# Altium PCB Alimentação v2.PcbDoc
Units mm, origin at the board's own origin, x right, y up, seen from the top; angles counter-clockwise.
Board outline 61.9 x 57.66 mm, 2 copper layers (Top Layer, Bottom Layer); 18 components, 10 nets, 39 pads, 0 vias.
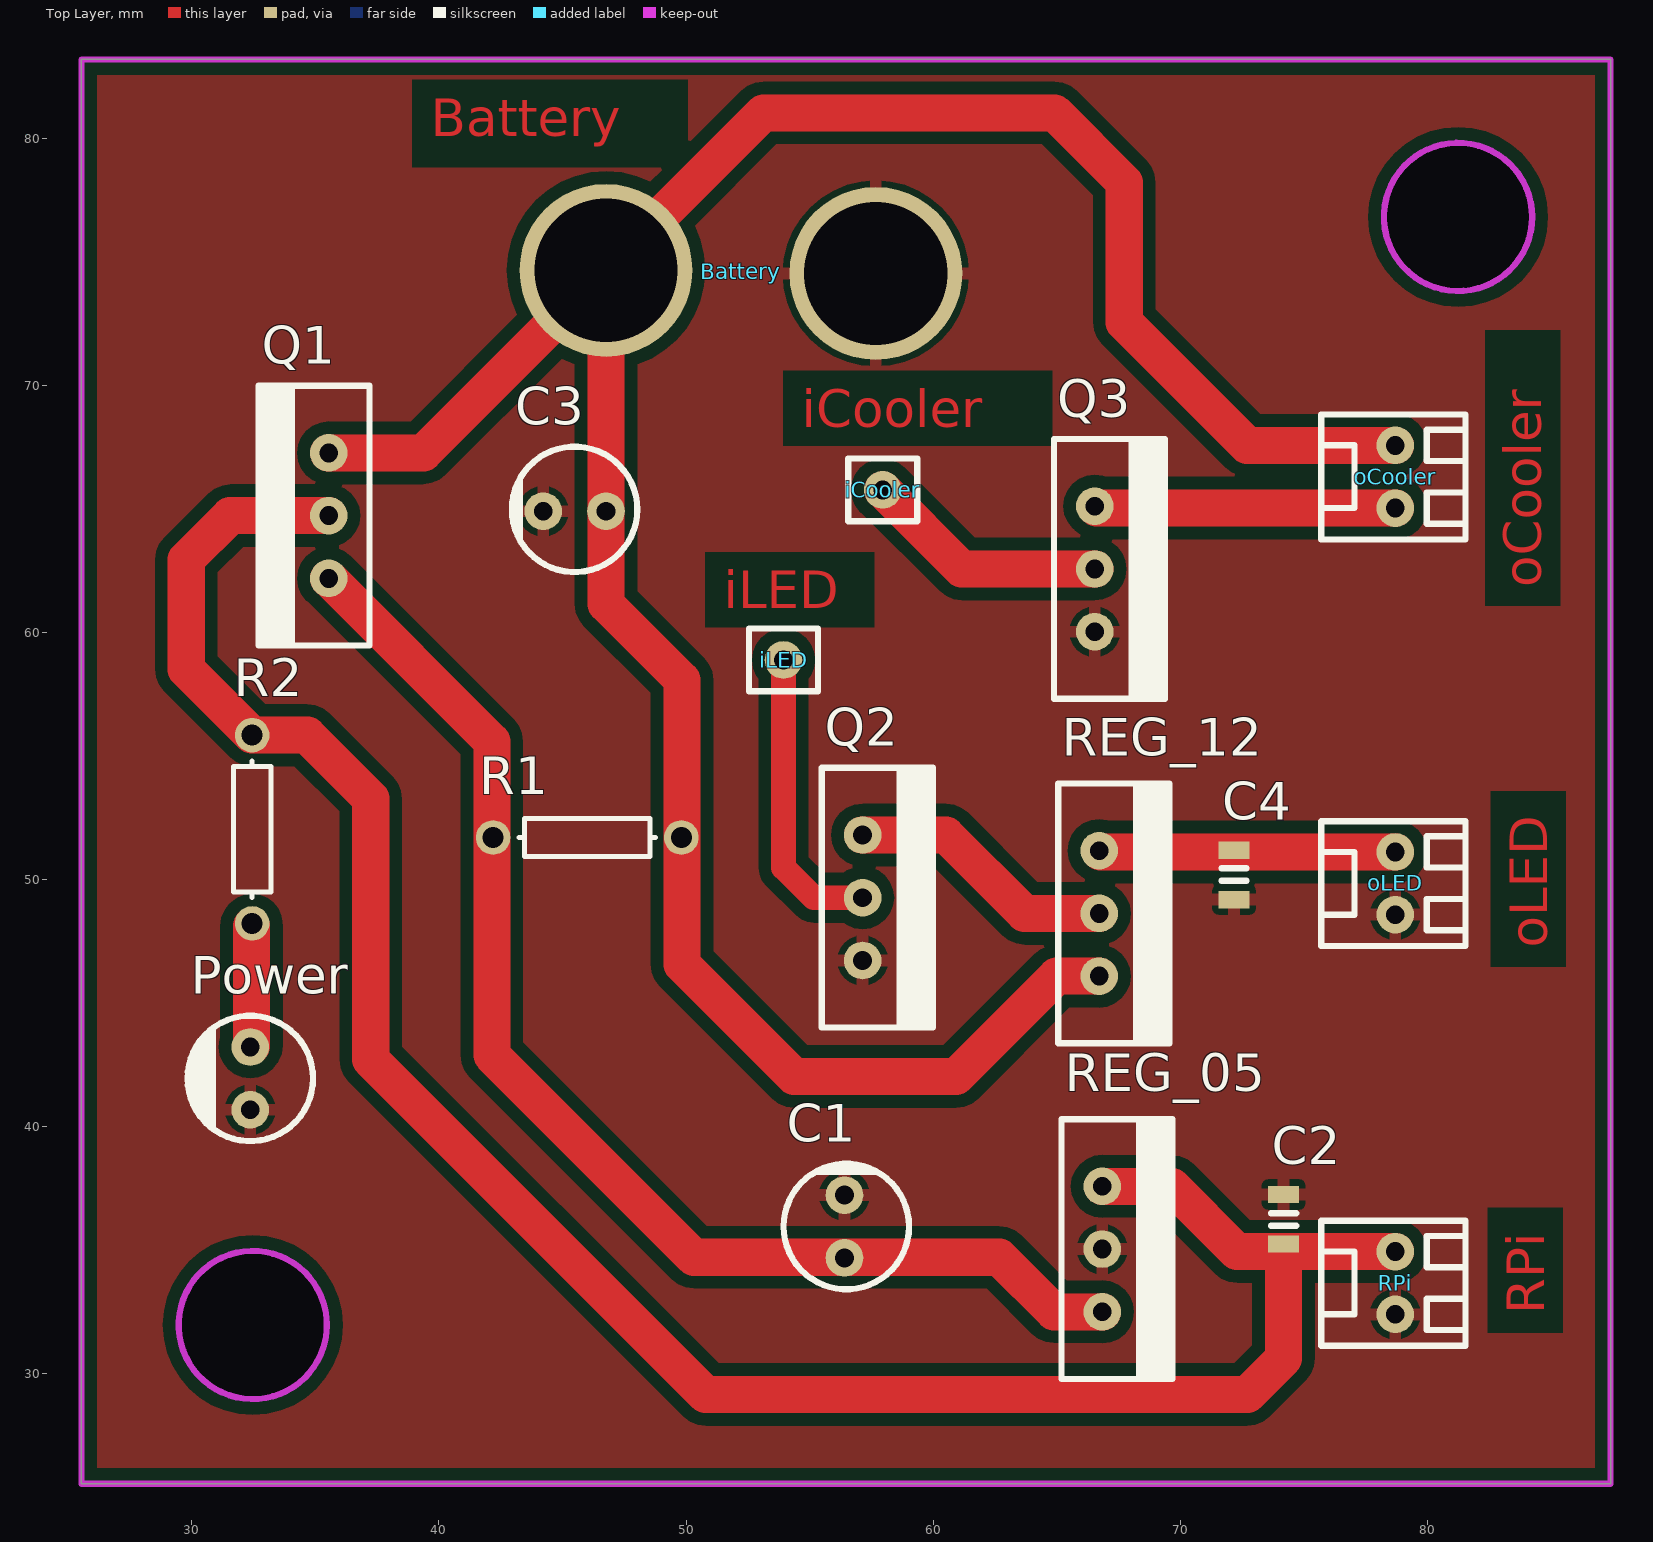
[diagram p0: Top Layer view]
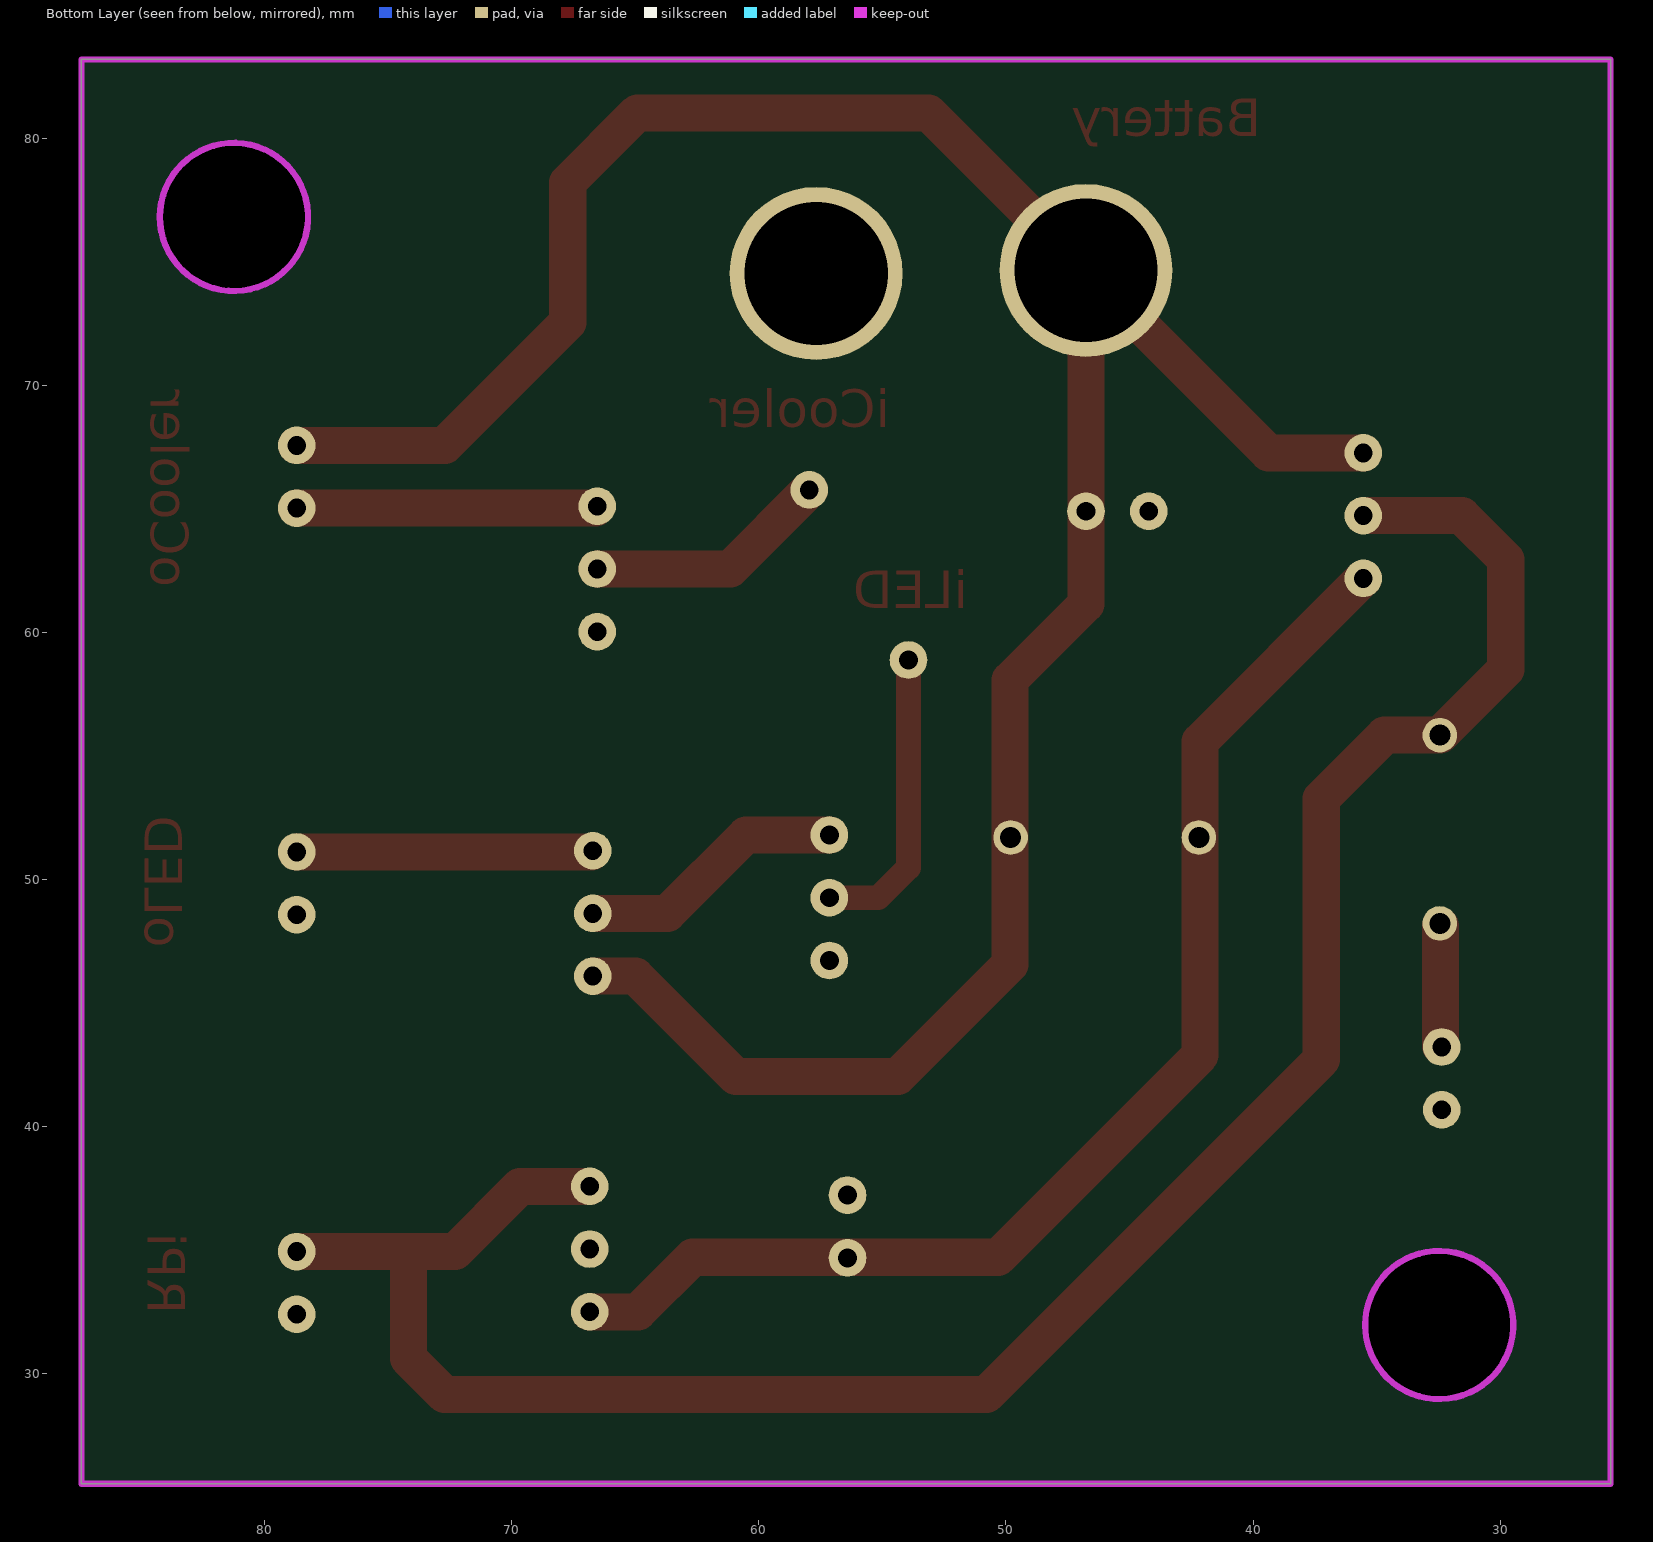
[diagram p1: Bottom Layer view, seen from below]
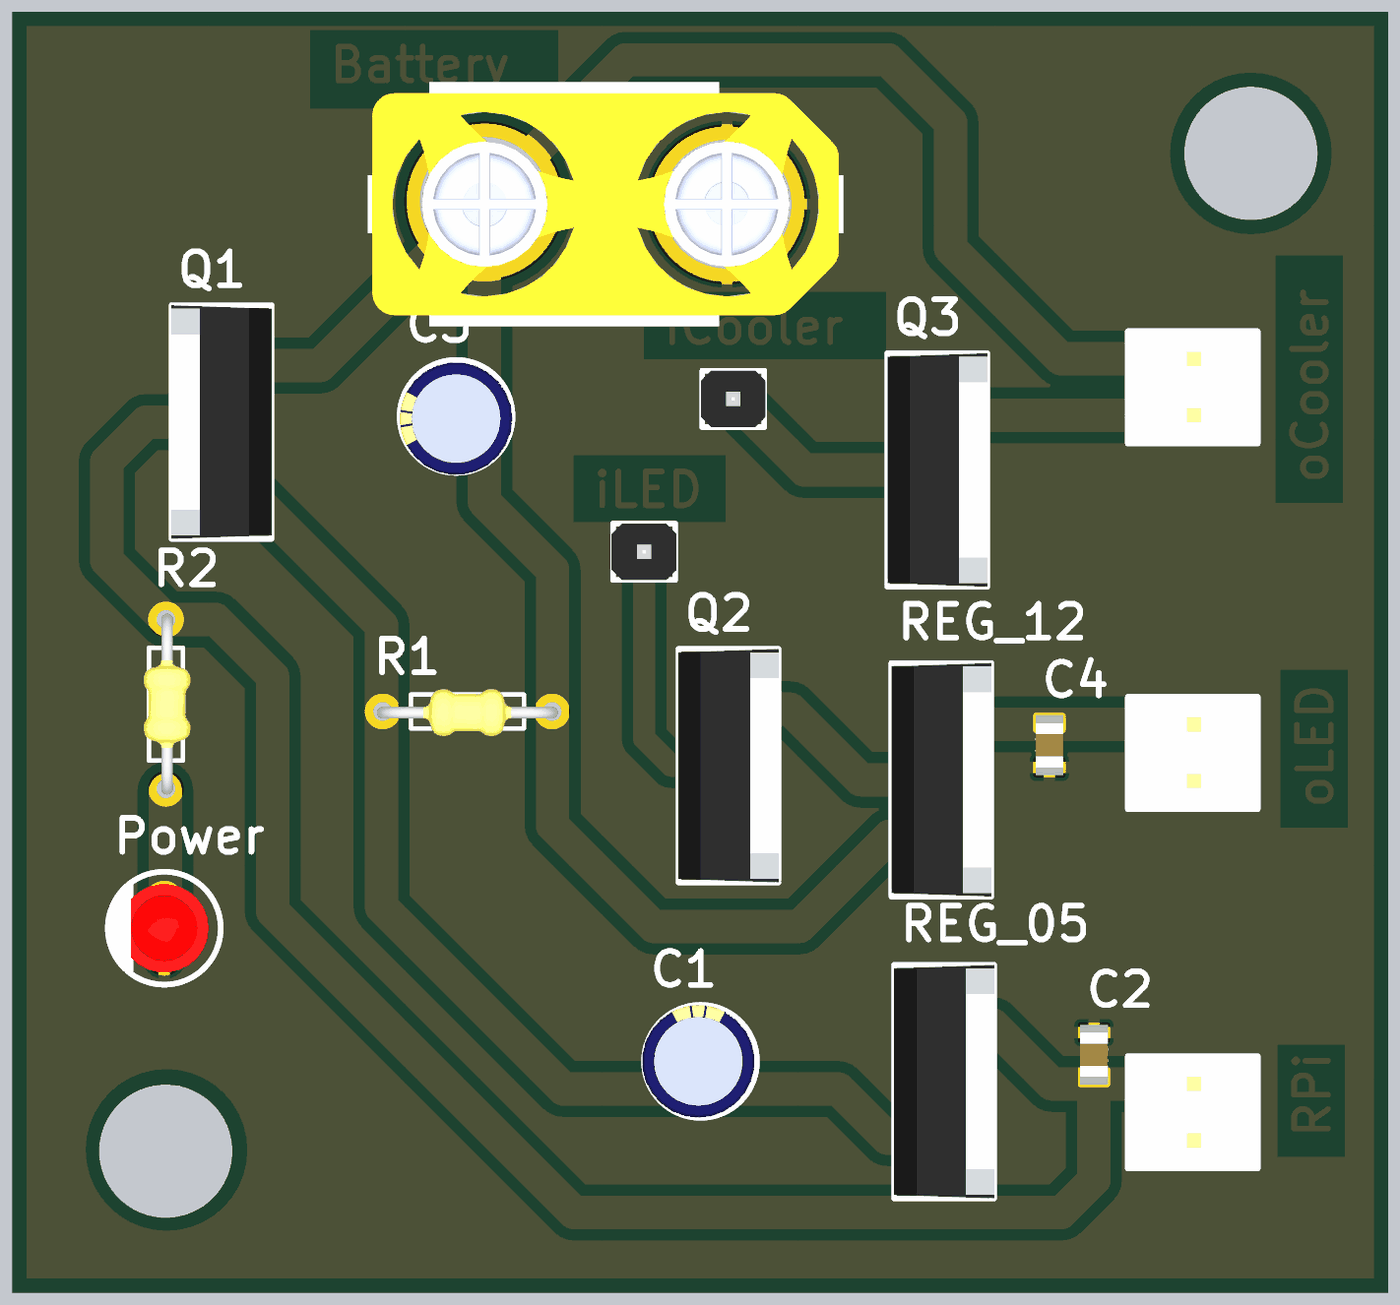
[diagram p2: 3D render of the assembled board from above, using the file's embedded part models]

## Layer stack, top to bottom
Top Solder: solder mask 0.0102, Solder Resist, Dk 3.5
Top Layer: signal copper 0.0356
Dielectric 1: dielectric 0.32, FR-4, Dk 4.8
Bottom Layer: signal copper 0.0356
Bottom Solder: solder mask 0.0102, Solder Resist, Dk 3.5

## Board outline
25.527,25.527 25.527,83.185 87.427,83.185 87.427,25.527
cut-out: 29.425,31.896 ccw(c32.425,31.896) 32.425,28.896 ccw(c32.425,31.896) 35.425,31.896 ccw(c32.425,31.896) 32.425,34.896 ccw(c32.425,31.896)
cut-out: 78.255,76.81 ccw(c81.255,76.81) 81.255,73.81 ccw(c81.255,76.81) 84.255,76.81 ccw(c81.255,76.81) 81.255,79.81 ccw(c81.255,76.81)

## Design rules (kind name [scope] priority, off if disabled: settings)
Clearance [All] p1: gap=0.5 ignorepadtopadclearanceinfootprint=FALSE except(0: Arc-Hole Track-Hole SMDPad-Hole THPad-Hole Via-Hole Fill-Hole Poly-Hole Region-Hole Text-Hole; 0.2: Arc-THPad Track-THPad THPad-THPad; 0.254: Arc-Text Track-Text; 0.4: Arc-Via Track-Via; 0.45: Arc-Arc Arc-Track Track-Track)
PolygonConnect [All] p1: connectstyle=Relief reliefconductorwidth=0.5 reliefentries=4 polygonreliefangle="90 Angle" airgapwidth=0.254
RoutingVias [All] p1: holewidth=0.711 width=1.27 viastyle="Through Hole" minholewidth=0.711 minwidth=1.27 maxholewidth=0.711 maxwidth=1.27
SolderMaskExpansion [All] p1: expansion=0.102
Width [All] p1: maxlimit=1.5 minlimit=0.6 preferedwidth=1.5
30 further rules are at their usual default settings.

## Components (designator, comment, footprint, x,y, rotation, side; value= is the part's Value field where it differs from the comment)
Battery "*" XT90 46.761,74.651 r0 top
C1 "*" "Eletrolytic Capacitor 5x5mm" 56.413,34.671 r90 top value=0.33uF
C2 "*" "SMD Capacitor" 74.193,37.236 r0 top value=0.1uF
C3 "*" "Eletrolytic Capacitor 5x5mm" 46.761,64.897 r180 top
C4 "*" "SMD Capacitor" 72.187,49.174 r180 top
iCooler "*" "HEADER 1X1 8.5MM" 57.963,65.761 r90 top
iLED "*" "HEADER 1X1 8.5MM" 53.95,58.877 r270 top
oCooler "*" KK2 78.715,65.024 r90 top
oLED "*" KK2 78.715,48.565 r90 top
Power "LED 5mm THT" "LED THT" 32.36,43.205 r270 top
Q1 "TIP121" TO-220 35.535,67.259 r270 top
Q2 "Mosfet N" TO-220 57.15,46.711 r90 top
Q3 "Mosfet N" TO-220 66.548,60.02 r90 top
R1 "Resistor THT" "RESISTOR THT 5mm" 45.999,51.689 r180 top value="3 ohm"
R2 "Resistor THT" "RESISTOR THT 5mm" 32.436,52.019 r270 top value=330
REG_05 "78XX TO-220" TO-220 66.853,32.487 r90 top
REG_12 "78XX TO-220" TO-220 66.726,46.076 r90 top
RPi "*" KK2 78.715,32.385 r90 top

## Footprints (in the part's own frame and the unit in brackets; to place one, negate y for a bottom-side part, rotate by r counter-clockwise, add the part's x,y. Pads: shape width x height; smd on the part's side, far side on the other; paste and mask are expansions set on the pad)
"Eletrolytic Capacitor 5x5mm" [mil]
  round 60 hole 30: 1(0,0) 2(100,0)
  silkscreen extent -50,-103 150,97, body extent -50,-99 150,101, height 520
"HEADER 1X1 8.5MM" [mil] "Stackable 1 pin header"
  round 60 hole 30: 1(0,0)
  silkscreen extent -50,-55 50,55, body extent -50,-57 50,57, height 335
KK2 [mil] "KK Conector, 2 ways"
  round 60 hole 30: 1(0,0) 2(100,0)
  silkscreen extent -50,-112 149,118, body extent -50,-116 150,114, height 468
"LED THT" [mil]
  round 60 hole 30: 1(0,0) 2(100,0)
  silkscreen extent -50,-100 150,100, body extent -28,-59 129,79, height 212
"RESISTOR THT 5mm" [mm]
  round 1.4 hole 0.85: 1(-3.81,0) 2(3.81,0)
  silkscreen extent -2.77,-0.76 2.77,0.76, body extent -4.07,-1 4.07,1.1, height 2.55
"SMD Capacitor" [mm]
  rect 1.25x0.7 smd: 1(0,0) 2(0,-2)
  silkscreen extent -0.51,-1.27 0.51,-0.76, body extent -0.63,-1.99 0.62,0.01, height 1
TO-220 [mil] "TO-220 coupling"
  round 60 hole 30: 1(0,0) 2(100,0) 3(200,0)
  silkscreen extent -107,-112 307,65, body extent -107,-112 307,65, height 810
XT90 [mm]
  round 7 hole 5.8 mask+0.102: 1(0,0)
  round 7 hole 5.8: 2(10.922,-0.127)
  body extent -5.24,-5.63 16.16,5.37, height 20.7

## Part data
Battery: library part XT90
C1 C3: library part "Electrolytic Capacitor 0.33uF"
C2 C4: library part "Capacitor SMD 0805"
iCooler iLED: library part "Male Pin Head 1x1"
oCooler oLED RPi: library part KK2, "KK Connector, 2 ways"
Q1: library part 2N3906, "PNP General Purpose Amplifier", ComponentLink1Description="Manufacturer Link", ComponentLink1URL=http://www.fairchildsemi.com/, ComponentLink2Description=Datasheet, ComponentLink2URL=http://www.fairchildsemi.com/ds/2N%2F2N3906.pdf, DatasheetVersion=1997, LatestRevisionDate=15-Jan-2003, LatestRevisionNote="PCB Footprint 'BCY-W3/D4.7' replaced", PackageDescription="TO, Flat Index; 3 In-Line, Axial Leads; Body Dia. 4.5mm; Leads 0.51 x 0.48 mm (max)", PackageReference=TO-92A, PackageVersion=Sep-1998, Published=8-Jun-2000, Publisher="Altium Limited"
Q2 Q3: Model=IRF3205

## Nets (pads, with @x,y where several pads share a name; then routed paths per layer and width w, separated by ;. In a path a pad name is that pad's centre, name@x,y a point inside that pad or via, vN(x,y) a via of type N, cw(c..) or ccw(c..) an arc to the next point about the centre after c; other vN are vias at no path point)
5V: C2.2 Q1.2 R2.1 REG_05.3 RPi.2 | length 91.6
  Top Layer w1.5: Q1.2 31.547,64.719 29.769,62.941 29.769,58.496 R2.1 34.671,55.829 37.236,53.264 37.236,42.697 50.8,29.134 72.72,29.134 74.193,30.607 C2.2@74.193,34.925 ; REG_05.3 69.666,37.567 72.307,34.925 C2.2@74.193,34.925 ; RPi.2 C2.2@74.193,34.925
C_Cooler: iCooler.1 Q3.2 | length 9.9
  Top Layer w1.5: iCooler.1 61.163,62.56 Q3.2
C_LED: iLED.1 Q2.2 | length 12.1
  Top Layer w1: iLED.1 53.95,50.47 55.169,49.251 Q2.2
C_out: oCooler.1 Q3.3 | length 12.1
  Top Layer w1.5: Q3.3@66.624,65.024 oCooler.1
GND: Battery.2 C1.2 C2.1 C3.2 C4.1 oLED.1 Power.2 Q2.1 Q3.1 REG_05.2 RPi.1
LED: C4.2 oLED.2 REG_12.3 | length 11.9
  Top Layer w1.5: REG_12.3@66.777,51.105 oLED.2
NetC1_1: C1.1 Q1.3 R1.2 REG_05.1 | length 51.1
  Top Layer w1.5: Q1.3 42.139,55.575 42.139,42.875 50.317,34.696 62.687,34.696 64.897,32.487 REG_05.1
NetPower_1: Power.1 R2.2 | length 4.9
  Top Layer w1.5: Power.1@32.41,43.256 R2.2@32.41,48.108
NetQ2_3: Q2.3 REG_12.2 | length 10.9
  Top Layer w1.5: Q2.3 60.528,51.791 63.703,48.616 REG_12.2
VCC: Battery.1 C3.1 oCooler.2 Q1.1 R1.1 REG_12.1 | length 107.6
  Top Layer w1.5: Q1.1 39.37,67.259 Battery.1 ; REG_12.1 64.999,46.076 60.935,42.012 54.381,42.012 49.835,46.558 49.835,58.067 46.761,61.14 C3.1 Battery.1 ; oCooler.2 72.72,67.564 67.742,72.542 67.742,78.207 64.922,81.026 53.137,81.026 Battery.1

## Polygon pours and split planes (outlines as drawn)
GND on Top Layer "Bottom Layer- GND" (solid, remove dead copper, pour order 20): 25.527,83.185 87.427,83.185 87.427,25.527 25.527,25.527

## Keep-outs
Keep-Out Layer:
  circle w0.254: c81.255,76.81 r3
  circle w0.254: c32.461,31.953 r3
  lines w0.254: 25.527,25.527 25.527,83.185 87.427,83.185 87.427,25.527 25.527,25.527